# Altium PCB Power.PcbDoc
Units mm, origin at the board's own origin, x right, y up, seen from the top; angles counter-clockwise.
Board outline 134.62 x 34.67 mm, 2 copper layers (Top Layer, Bottom Layer); 16 components, 10 nets, 36 pads, 0 vias.
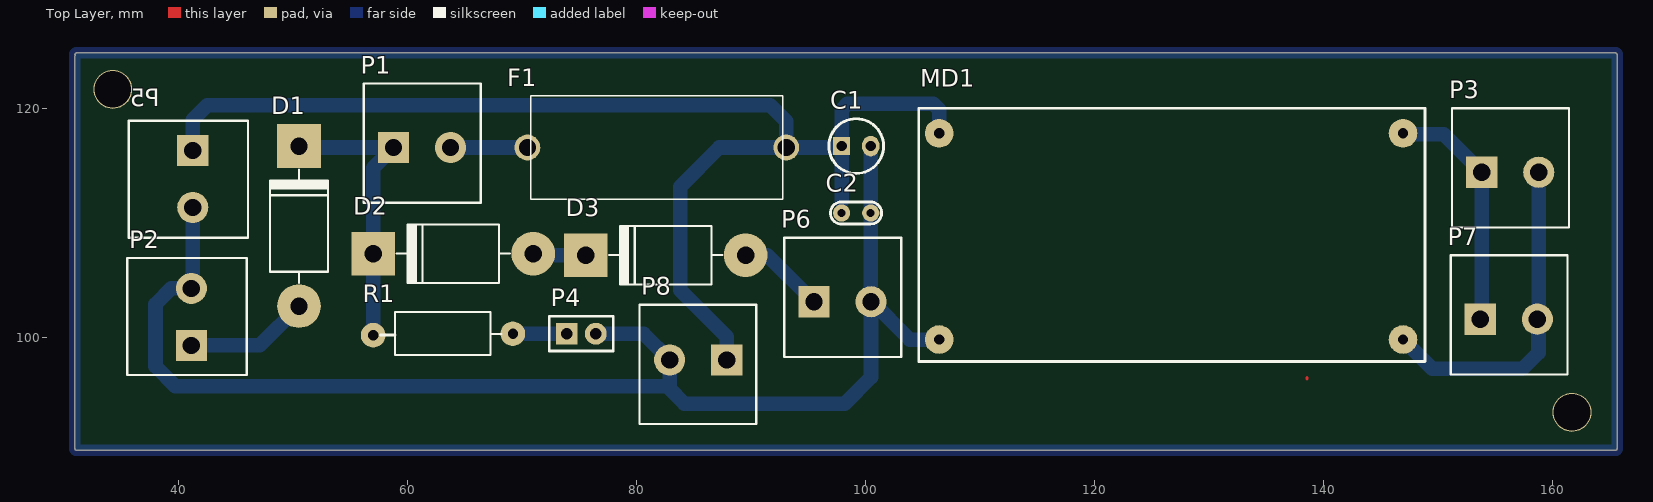
[diagram p0: Top Layer view]
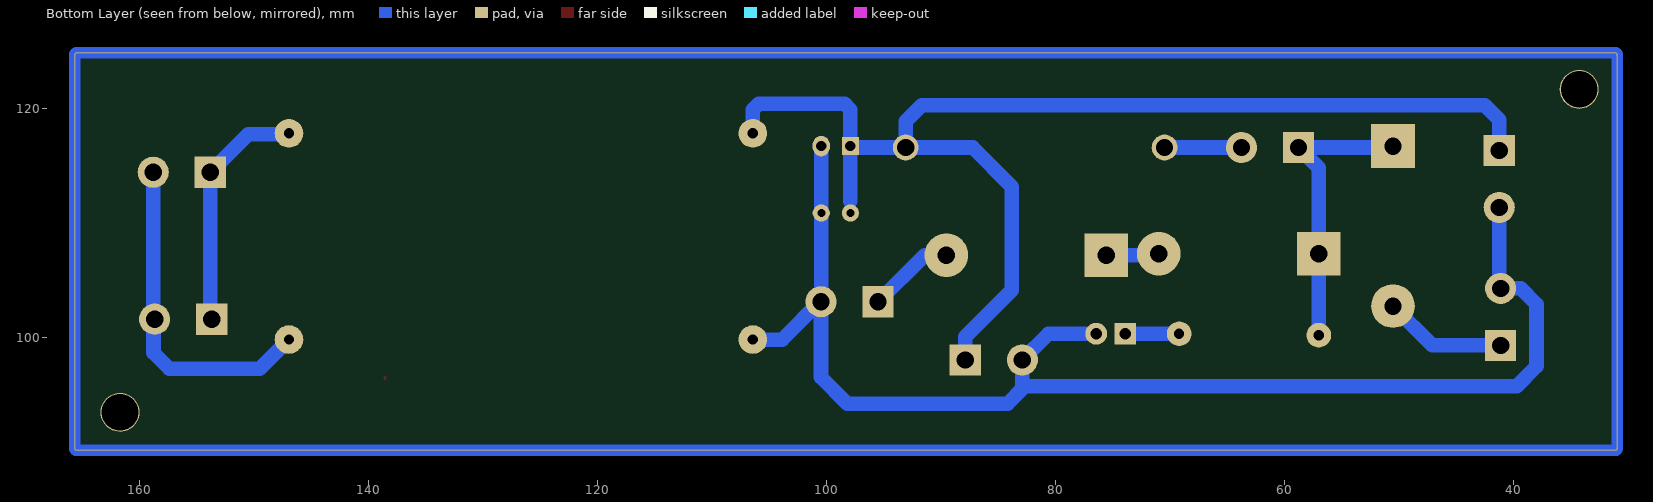
[diagram p1: Bottom Layer view, seen from below]
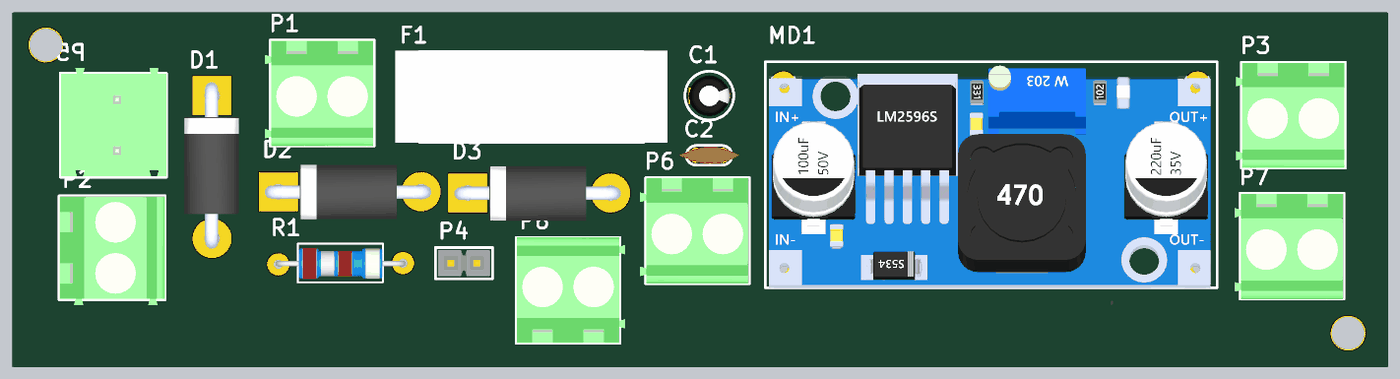
[diagram p2: 3D render of the assembled board from above, using the file's embedded part models]

## Layer stack, top to bottom
Top Solder: solder mask 0.0102, Solder Resist, Dk 3.5
Top Layer: signal copper 0.0356
Dielectric 1: dielectric 0.32, FR-4, Dk 4.8
Bottom Layer: signal copper 0.0356
Bottom Solder: solder mask 0.0102, Solder Resist, Dk 3.5

## Board outline
30.988,90.297 30.988,124.587 cw(c31.115,124.587) 31.005,124.65 cw(c31.115,124.714) 31.115,124.841 165.481,124.841 cw(c165.481,124.714) 165.608,124.714 165.608,90.297 cw(c165.481,90.297) 165.481,90.17 31.115,90.17 cw(c31.115,90.297)

## Design rules (kind name [scope] priority, off if disabled: settings)
Clearance [All] p1: gap=0.3
PolygonConnect [All] p1: connectstyle=Relief reliefconductorwidth=0.254 reliefentries=4 polygonreliefangle="90 Angle" airgapwidth=0.254
RoomDefinition Nguon_l1 [InComponentClass('Nguon_l1')] p1: confinementstyle=ConfineIn formatcopy=TRUE lockcomponents=FALSE outline 0,0 50.8,0 50.8,25.4 0,25.4
RoutingVias [All] p1: holewidth=0.711 width=1.27 viastyle="Through Hole" minholewidth=0.711 minwidth=1.27 maxholewidth=0.711 maxwidth=1.27
SolderMaskExpansion [All] p1: expansion=0.102
Width [All] p1: maxlimit=1.27 minlimit=0.254 preferedwidth=0.762
30 further rules are at their usual default settings.

## Components (designator, comment, footprint, x,y, rotation, side; value= is the part's Value field where it differs from the comment)
C1 "Cap Pol 3mm" C3MM 99.187,116.713 r0 top
C2 "104" "tu gom" 99.187,110.871 r0 top
D1 "1N5408" D5A 50.546,116.713 r270 top
D2 "1N5408" D5A 57.023,107.315 r0 top
D3 "1N5408" D5A 75.565,107.188 r0 top
F1 "F1A" Fuse3 81.788,116.586 r0 top
MD1 "MD LM2596S" "MD L2596" 106.426,99.822 r0 top
P1 "cong tac" "TBlock 2" 58.801,116.586 r0 top
P2 "JACK_12V" "TBlock 2" 41.148,99.314 r90 top
P3 "JACK_5V" "TBlock 2" 153.797,114.427 r0 top
P4 "led" "Header 2" 73.914,100.33 r0 top
P5 "JACK_12V" "TBlock 2" 41.275,116.332 r270 top
P6 "JACK_pin" "TBlock 2" 95.504,103.124 r0 top
P7 "JACK_5V" "TBlock 2" 153.67,101.6 r0 top
P8 "JACK_12V" "TBlock 2" 87.884,98.044 r180 top
R1 "220" RES-1/2W 62.611,100.33 r0 top

## Footprints (in the part's own frame and the unit in brackets; to place one, negate y for a bottom-side part, rotate by r counter-clockwise, add the part's x,y. Pads: shape width x height; smd on the part's side, far side on the other; paste and mask are expansions set on the pad)
C3MM [mm]
  rect 1.5x1.58 hole 0.9: 1(-1.27,0)
  oval 1.5x1.8 hole 0.9: 2(1.27,0)
  silkscreen extent -2.39,-2.39 2.39,2.39, body extent -2,-2.03 1.99,1.97, height 7.01
D5A [mil] "Diode 5A, W 200mil, L 550mil"
  round 150 hole 60: 1(550,0)
  rect 150x150 hole 60: 2(0,0)
  silkscreen extent 80,-100 470,100, body extent -52,-106 590,103, height 254
Fuse3 [mm] "FUSEHOLDER BLOCKS - PCB - CLIP COVER - THT - WR-FSH"
  round 2.25 hole 1.5: 1(-11.3,0) 2(11.3,0)
  silkscreen extent -11,-4.5 11,4.5, body extent -13.3,-4.5 13.3,4.5, height 28.11
"Header 2" [mil] "Connector; Header; 2 Position; Solder Pad 35mil"
  rect 75x75 hole 40: 1(0,0)
  round 75 hole 40: 2(100,0)
  silkscreen extent -60,-60 160,60, body extent -50,-50 150,50, height 330
"MD L2596" [mm]
  round 2.5 hole 0.9: 1(0,18) 2(0,0) 3(40.5,18) 4(40.5,0)
  Top Layer lines w0.254: 32.13,-3.301 32.131,-3.429
  silkscreen extent -1.78,-1.91 42.42,20.19, body extent -1.4,-2.25 41.8,21.3, height 14.99
RES-1/2W [mil]
  round 85 hole 35: 1(-220,-5) 2(260,0)
  silkscreen extent -195,-74 221,75, body extent -230,-60 270,56, height 121
"TBlock 2" [mil] "Connector; Terminal; 2 Positions; Solder Pad 35mil"
  rect 107x107 hole 59.06: 1(0,0)
  round 107 hole 59.06: 2(196,0)
  silkscreen extent -102,-190 300,220, body extent -122,-189 296,217, height 560
"tu gom" [mm] "Tu gom mini"
  round 1.5 hole 0.7: 1(-1.27,0) 2(1.27,0)
  silkscreen extent -2.25,-0.97 2.22,0.97, body extent -2.92,-0.85 2.92,0.85, height 6.12

## Part data
C1: "Polarized Capacitor (Axial)"
C2: library part "Tu gom 104 50V", "C?m"
D1 D2 D3: library part D5A, "Diode 5A"
F1: library part Fuse, "Fuse"
MD1: library part "MD LM2596"
P1 P2 P3 P4 P5 P6 P7 P8: library part "Header 2", "Header, 2-Pin"
R1: library part Res, "Res"

## Free pads (board coordinates)
  round 3.4 hole 3.2: 2(34.29,121.666) 2(161.671,93.472)

## Nets (pads, with @x,y where several pads share a name; then routed paths per layer and width w, separated by ;. In a path a pad name is that pad's centre, name@x,y a point inside that pad or via, vN(x,y) a via of type N, cw(c..) or ccw(c..) an arc to the next point about the centre after c; other vN are vias at no path point)
+5: MD1.3 P3.1 P7.1 | length 21.1
  Bottom Layer w1.27: MD1.3@146.926,117.729 150.495,117.729 P3.1 153.797,101.727 P7.1
+12: C1.1 C2.1 F1.2 MD1.1 P5.1 P8.1 | length 109.2
  Bottom Layer w0.76: F1.2 F1.2@93.98,116.586
  Bottom Layer w1.27: P5.1 41.275,118.999 42.545,120.269 91.694,120.269 93.088,118.875 F1.2 87.249,116.586 83.82,113.157 83.82,104.14 87.884,100.076 P8.1 ; F1.2@93.98,116.586 C1.1@97.917,116.586 ; 97.917,111.887 97.917,119.888 98.425,120.396 105.918,120.396 106.426,119.888 MD1.1
GND: C1.2 C2.2 MD1.2 P2.2 P4.2 P5.2 P6.2 P8.2 | length 120.6
  Bottom Layer w1.27: P2.2 39.395,104.292 38.019,102.916 38.019,97.49 39.751,95.758 82.906,95.758 P8.2 ; P2.2@41.275,104.419 P5.2 ; P4.2 80.62,100.33 P8.2 ; C1.2@100.457,116.967 100.457,111.887 100.457,103.251 103.886,99.822 MD1.2 ; P6.2 100.482,96.545 98.171,94.234 84.201,94.234 82.906,95.529 P8.2
GND_OUT: MD1.4 P3.2 P7.2 | length 29.3
  Bottom Layer w1.27: MD1.4@146.939,99.822 149.479,97.282 157.353,97.282 158.75,98.679 158.75,101.498 P7.2 158.775,101.727 P3.2
NetD1_1: D1.1 P2.1 | length 10.8
  Bottom Layer w1.27: P2.1 47.117,99.314 D1.1
NetD1_2: D1.2 D2.2 P1.1 R1.1 | length 25.7
  Bottom Layer w1.27: D1.2@50.292,116.84 50.546,116.586 P1.1 57.023,114.808 D2.2 R1.1
NetD2_1: D2.1 D3.2 | length 4.6
  Bottom Layer w0.76: D2.1 D2.1@71.12,107.188
  Bottom Layer w1.27: D2.1@71.12,107.188 D3.2
NetD3_1: D3.1 P6.1 | length 7.7
  Bottom Layer w1.27: D3.1 91.44,107.188 P6.1
NetF1_1: F1.1 P1.2 | length 6.7
  Bottom Layer w1.27: P1.2 F1.1
NetP4_1: P4.1 R1.2 | length 4.7
  Bottom Layer w1.27: R1.2 P4.1
copper on no net: | length 944.9
  Bottom Layer w0.254: 31.115,124.587 31.115,90.297 165.481,90.297 ; 31.115,124.714 165.481,124.714
  Bottom Layer w1: 30.988,90.297 ccw(c31.115,90.297) 31.115,90.17 ; 30.988,90.297 ccw(c31.115,90.297) 31.115,90.17 ; 30.988,90.297 30.988,124.587 ; 30.988,90.297 30.988,124.587 ; 30.988,124.587 cw(c31.115,124.587) 31.005,124.65 ; 30.988,124.587 cw(c31.115,124.587) 31.005,124.65 ; 31.005,124.65 cw(c31.115,124.714) 31.115,124.841 ; 31.005,124.65 cw(c31.115,124.714) 31.115,124.841 ; 31.115,90.17 165.481,90.17 ; 31.115,90.17 165.481,90.17 ; 31.115,124.841 165.481,124.841 ; 31.115,124.841 165.481,124.841 ; 165.481,90.17 ccw(c165.481,90.297) 165.608,90.297 165.608,124.714 ccw(c165.481,124.714) 165.481,124.841